# Altium PCB PCB-CAPE-Nucleo_Interface_V1R0.PcbDoc (part 1 of 2)
Units mm, origin at the board's own origin, x right, y up, seen from the top; angles counter-clockwise.
Board outline 100 x 100 mm, 4 copper layers (Top Layer, Layer 1, Layer 2, Bottom Layer), stack 1.494 mm thick; 130 components, 101 nets, 458 pads, 87 vias.
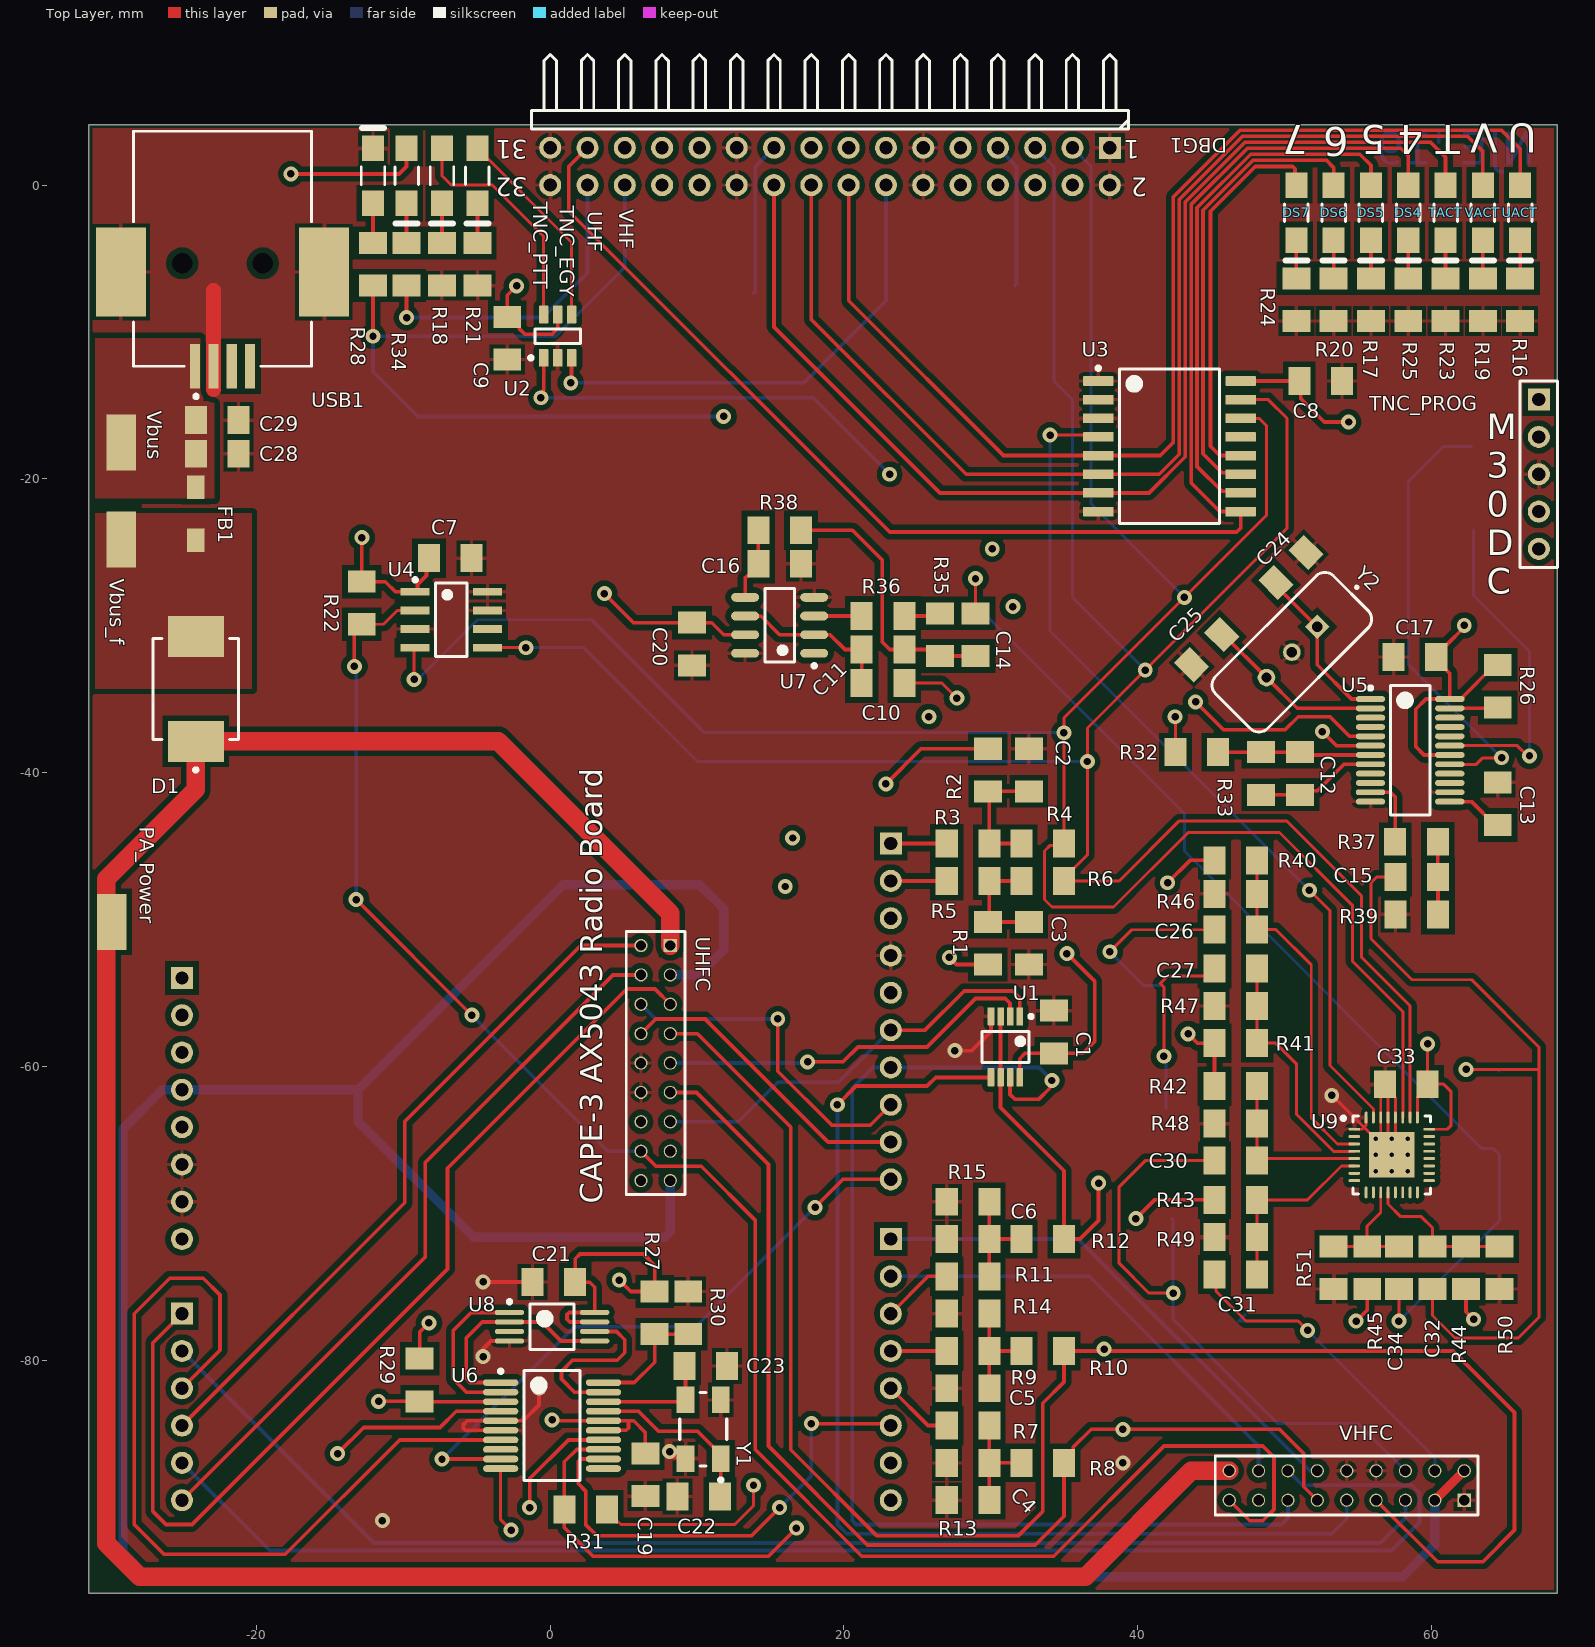
[diagram p0: Top Layer view]
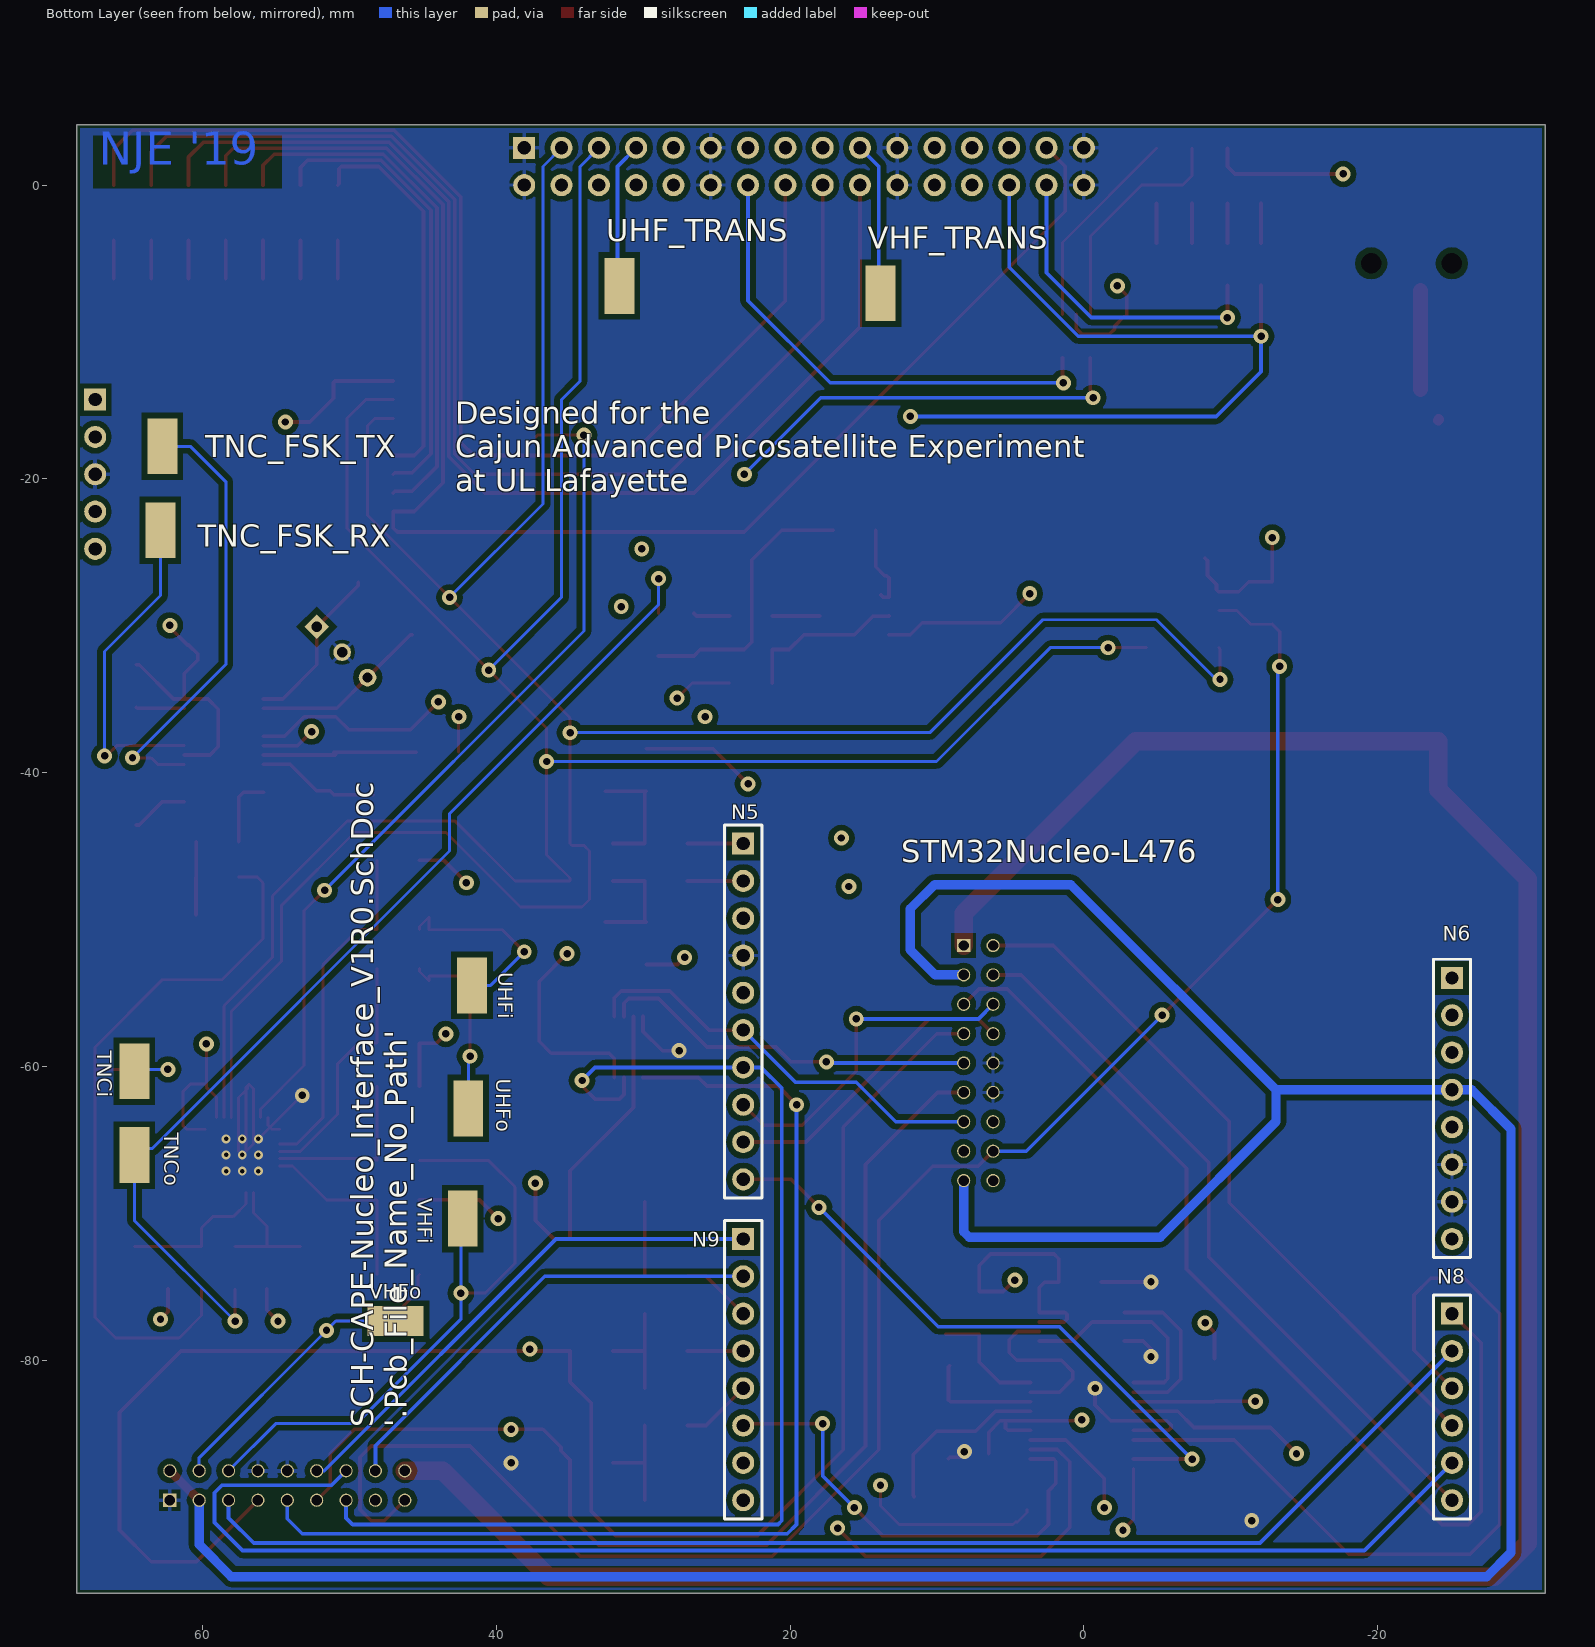
[diagram p1: Bottom Layer view, seen from below]
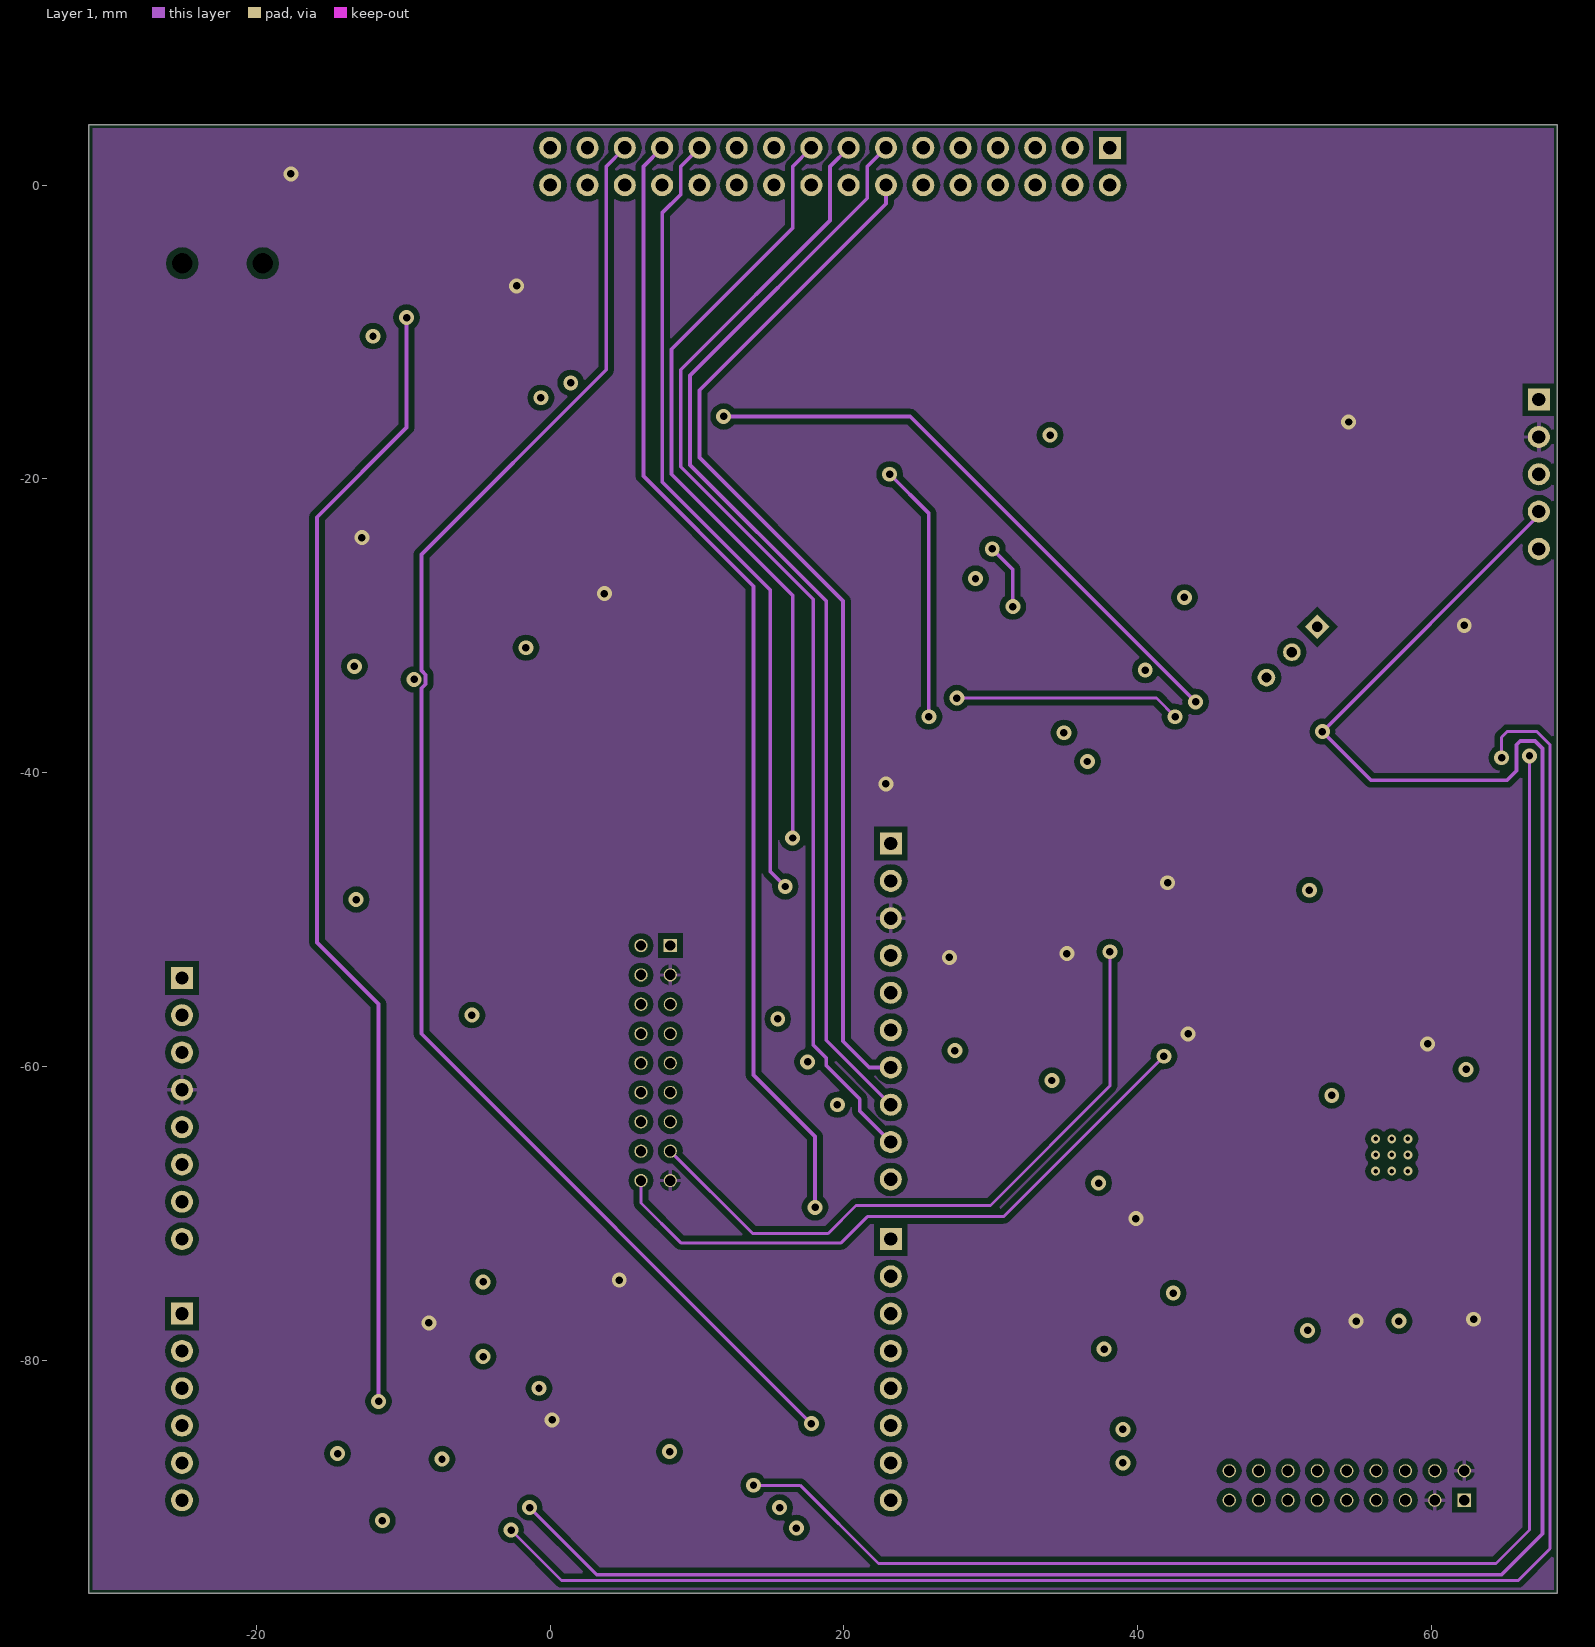
[diagram p2: Layer 1]
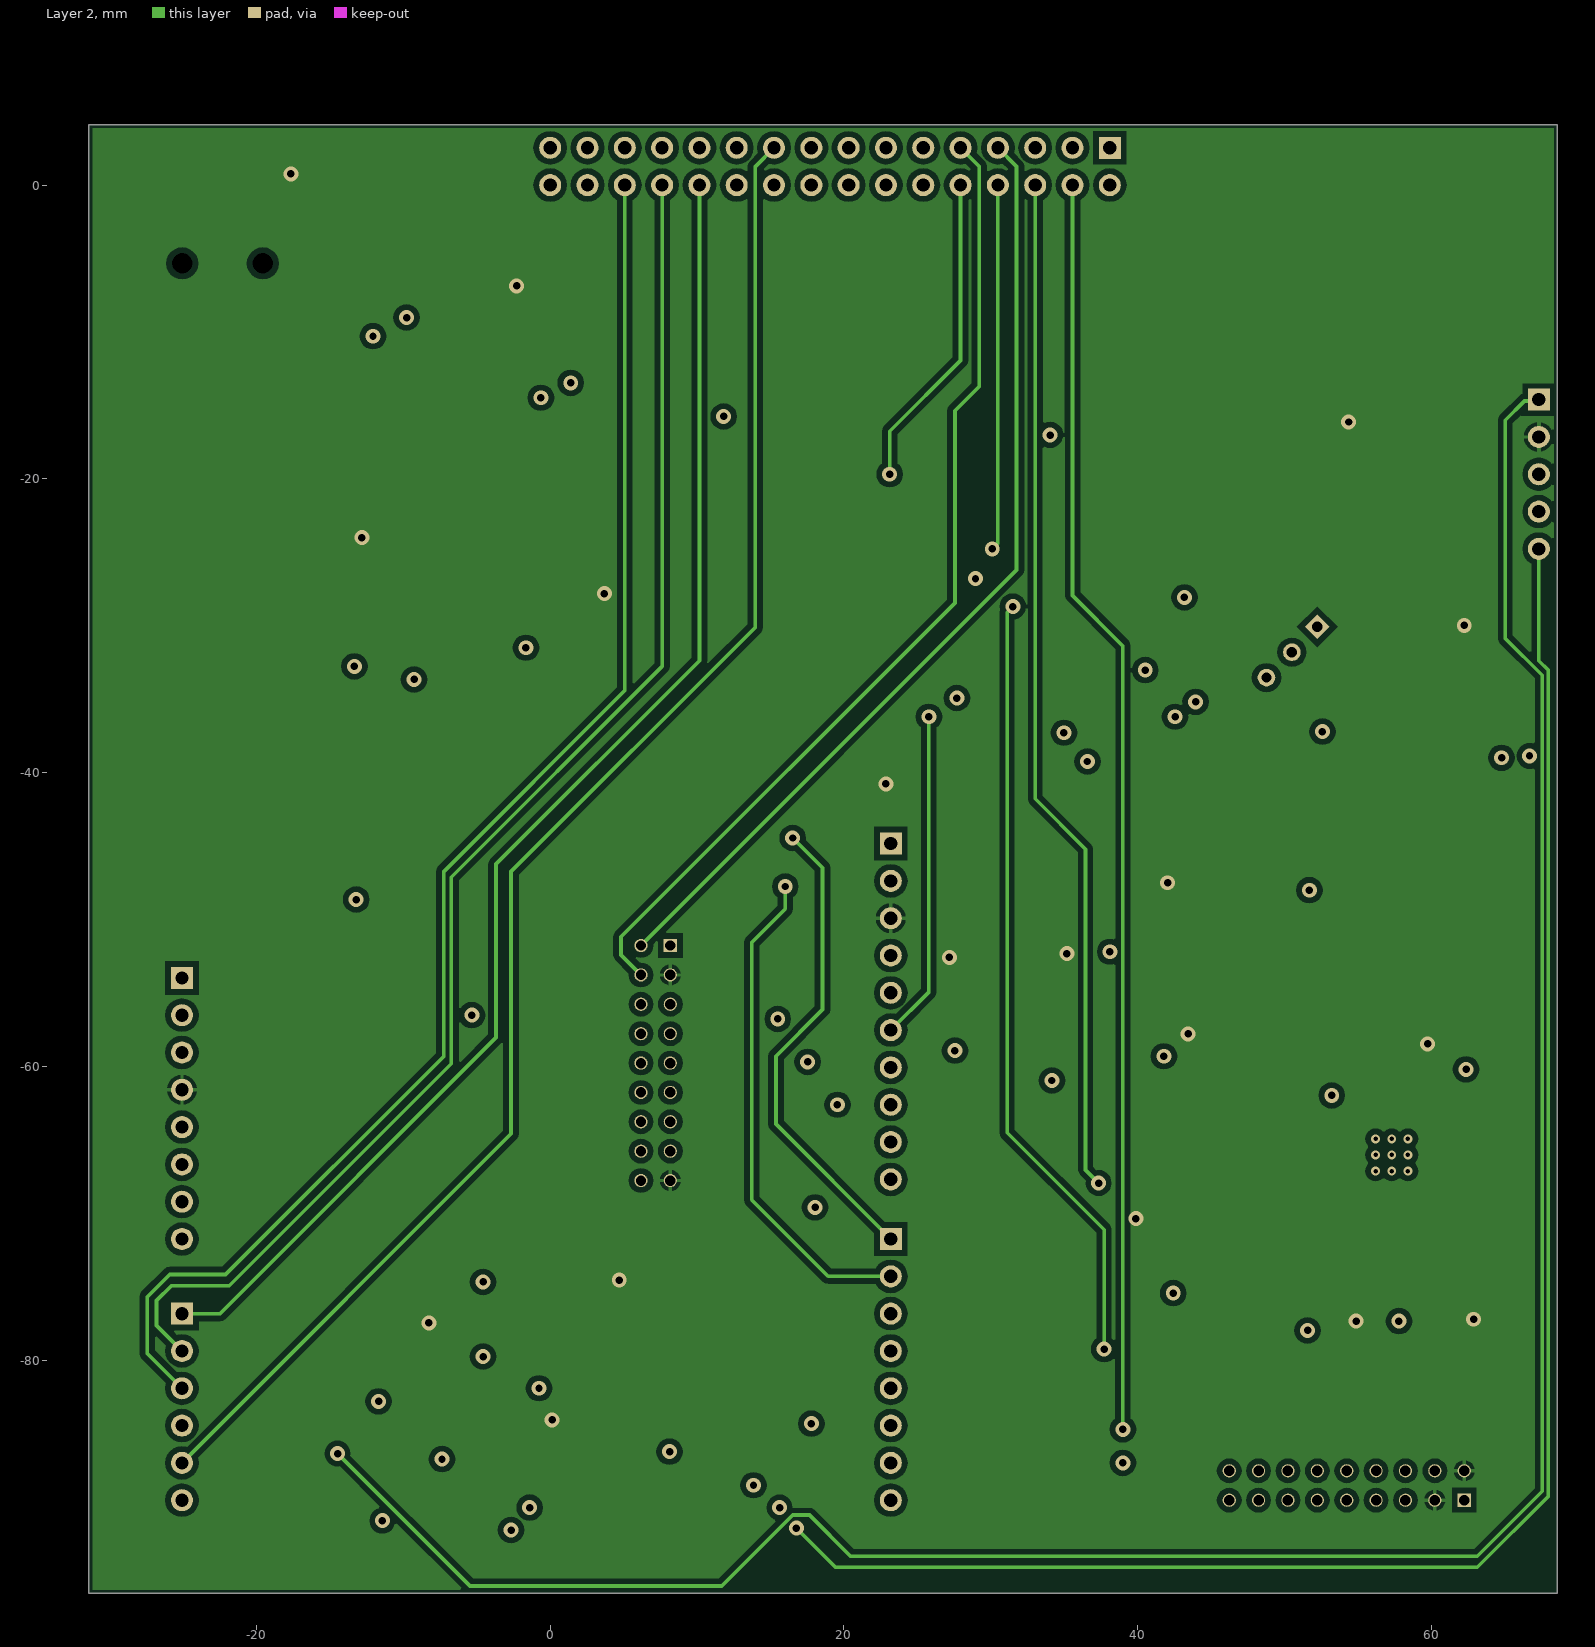
[diagram p3: Layer 2]

## Layer stack, top to bottom
Top Solder: solder mask 0.0102, Solder Resist, Dk 3.5
Top Layer: signal copper 0.035
Dielectric 2: prepreg 0.1118, PP-015, Dk 4.3
Layer 1: signal copper 0.035
Dielectric 1: dielectric 1.13, FR-4, Dk 3.96
Layer 2: signal copper 0.035
Dielectric 3: prepreg 0.1118, PP-015, Dk 4.3
Bottom Layer: signal copper 0.035
Bottom Solder: solder mask 0.0102, Solder Resist, Dk 3.5

## Board outline
-31.42,-95.885 68.58,-95.885 68.58,4.115 -31.42,4.115

## Design rules (kind name [scope] priority, off if disabled: settings)
BoardOutlineClearance [(OnLayer('Top Layer') OR OnLayer('Bottom Layer') OR OnLayer('Layer 1') OR OnLayer('Layer 2'))] p1: gap=0.254 ignorepadtopadclearanceinfootprint=FALSE except(0: Arc-SplitContinuation Track-SplitContinuation SMDPad-SplitContinuation THPad-SplitContinuation Via-SplitContinuation Fill-SplitContinuation Poly-SplitContinuation Region-SplitContinuation Text-SplitContinuation)
Clearance [All] p1: gap=0.152 ignorepadtopadclearanceinfootprint=FALSE except(0.381: Arc-Poly Track-Poly SMDPad-Poly THPad-Poly Via-Poly Fill-Poly Poly-Poly Poly-Region Poly-Text Poly-Hole)
HoleSize [All] p1: absolutevalues=TRUE maxlimit=25.4 minlimit=0.305 maxpercent=80.000 minpercent=20.000
MinimumSolderMaskSliver [All] p1: minsoldermaskwidth=0
PolygonConnect PowerConnect [(InNet('3V3') OR InNet('GND'))] p1: thpad.connectstyle=Relief thpad.reliefconductorwidth=0.254 thpad.reliefentries=4 thpad.polygonreliefangle="90 Angle" thpad.airgapwidth=0.254 smdpad.connectstyle=Relief smdpad.reliefconductorwidth=0.254 smdpad.reliefentries=4 smdpad.polygonreliefangle="90 Angle" smdpad.airgapwidth=0.254 via.connectstyle=Direct via.reliefconductorwidth=0.254 via.reliefentries=4 via.polygonreliefangle="90 Angle" via.airgapwidth=0.254
PolygonConnect [All] p2: connectstyle=Direct reliefconductorwidth=0.254 reliefentries=4 polygonreliefangle="90 Angle" airgapwidth=0.254
RoutingVias [All] p1: holewidth=0.508 width=1.016 viastyle="Through Hole" minholewidth=0.305 minwidth=0.61 maxholewidth=5.08 maxwidth=12.7
SilkToSilkClearance [All] p1: silktosilkclearance=0
SilkToSolderMaskClearance [IsPad] p1: minsilkscreentomaskgap=0 clearancetoexposedcopper=TRUE
SolderMaskExpansion [All] p1: expansion=0.102
Width [All] p1: maxlimit=25.4 minlimit=0.152 preferedwidth=0.254
26 further rules are at their usual default settings.

## Components (designator, comment, footprint, x,y, rotation, side; value= is the part's Value field where it differs from the comment)
C1 "SMT Capacitor" 1206_GENERIC 34.29,-57.658 r90 top value="0.1 µF"
C2 "SMT Capacitor" 1206_GENERIC 32.588,-39.825 r270 top value="150 pF"
C3 "SMT Capacitor" 1206_GENERIC 32.588,-51.615 r90 top value="150 pF"
C4 "SMT Capacitor" 1206_GENERIC 28.45,-86.995 r0 top value="150 pF"
C5 "SMT Capacitor" 1206_GENERIC 28.45,-81.915 r0 top value="150 pF"
C6 "SMT Capacitor" 1206_GENERIC 28.45,-71.755 r0 top value="150 pF"
C7 "SMT Capacitor" 1206_GENERIC -6.805,-25.4 r0 top value="0.1 µF"
C8 "SMT Capacitor" 1206_GENERIC 52.451,-13.335 r0 top value="0.1 µF"
C9 "SMT Capacitor" 1206_GENERIC -2.921,-10.414 r270 top value="0.1 µF"
C10 "SMT Capacitor" 1206_GENERIC 22.659,-33.909 r180 top value="0.1 µF"
C11 "SMT Capacitor" 1206_GENERIC 22.659,-31.623 r0 top value="0.01 µF"
C12 "SMT Capacitor" 1206_GENERIC 51.054,-40.058 r270 top value="100 pF"
C13 "SMT Capacitor" 1206_GENERIC 64.516,-42.111 r90 top value="0.1 µF"
C14 "SMT Capacitor" 1206_GENERIC 28.956,-30.607 r90 top value="0.1 µF"
C15 "SMT Capacitor" 1206_GENERIC 59.002,-47.117 r180 top value="0.1 µF"
C16 "SMT Capacitor" 1206_GENERIC 15.621,-25.781 r180 top value="0.1 µF"
C17 "SMT Capacitor" 1206_GENERIC 58.875,-32.131 r180 top value="0.1 µF"
C19 "SMT Capacitor" 1206_GENERIC 6.477,-87.81 r90 top value="0.1 µF"
C20 "SMT Capacitor" 1206_GENERIC 9.652,-31.242 r90 top value="0.1 µF"
C21 "SMT Capacitor" 1206_GENERIC 0.254,-74.676 r0 top value="0.1 µF"
C22 "SMT Capacitor" 1206_GENERIC 10.107,-89.281 r0 top value="33 pF"
C23 "SMT Capacitor" 1206_GENERIC 10.594,-80.391 r180 top value="33 pF"
C24 "SMT Capacitor" 1206_GENERIC 50.428,-26.026 r225 top value="33 pF"
C25 "SMT Capacitor" 1206_GENERIC 44.695,-31.632 r45 top value="33 pF"
C26 "SMT Capacitor" 1206_GENERIC 46.683,-50.673 r180 top value="1 µF"
C27 "SMT Capacitor" 1206_GENERIC 46.683,-53.34 r180 top value="1 µF"
C28 "SMT Capacitor" 1206_GENERIC -22.68,-18.288 r180 top value="4.7 µF"
C29 "SMT Capacitor" 1206_GENERIC -22.68,-16.002 r180 top value="0.01 µF"
C30 "SMT Capacitor" 1206_GENERIC 46.683,-66.421 r180 top value="1 µF"
C31 "SMT Capacitor" 1206_GENERIC 46.683,-74.168 r180 top value="1 µF"
C32 "SMT Capacitor" 1206_GENERIC 60.071,-73.713 r270 top value="1 µF"
C33 "SMT Capacitor" 1206_GENERIC 58.293,-61.214 r180 top value="0.1 µF"
C34 "SMT Capacitor" 1206_GENERIC 57.785,-73.713 r270 top value="1 µF"
D1 "MBRS340T3" ONSC-SMC-2-403-03_V -24.13,-34.303 r90 top
DBG1 "Digital Discovery" HDR2X16H 38.1,2.54 r180 top
DS4 "APTD3216CGCK" KING-APTD3216CGCK_V 58.42,-1.875 r270 top
DS5 "APTD3216CGCK" KING-APTD3216CGCK_V 55.88,-1.875 r270 top
DS6 "APTD3216CGCK" KING-APTD3216CGCK_V 53.34,-1.875 r270 top
DS7 "APTD3216CGCK" KING-APTD3216CGCK_V 50.8,-1.875 r270 top
FB1 "BLM31PG121SN1L" MURA-BLM31-B35-CHIP-2_V2 -24.13,-22.374 r270 top
N5 "Header 10" HDR1X10 23.19,-44.831 r270 bottom locked
N6 "Header 8" HDR1X8 -25.07,-53.975 r270 bottom locked
N8 "Header 6" HDR1X6 -25.07,-76.835 r270 bottom locked
N9 "Header 8" HDR1X8 23.19,-71.755 r270 bottom locked
PA_Power "5019" KSTN-5019_V -29.845,-50.165 r90 top
R1 "SMT Resistor" 1206_GENERIC 29.794,-51.615 r270 top value="2.2 KO"
R2 "SMT Resistor" 1206_GENERIC 29.794,-39.825 r90 top value="2.2 KO"
R3 "SMT Resistor" 1206_GENERIC 28.45,-44.831 r0 top value=56
R4 "SMT Resistor" 1206_GENERIC 33.53,-44.831 r0 top value=160
R5 "SMT Resistor" 1206_GENERIC 28.45,-47.371 r0 top value=56
R6 "SMT Resistor" 1206_GENERIC 33.53,-47.371 r0 top value=160
R7 "SMT Resistor" 1206_GENERIC 28.45,-84.455 r0 top value=56
R8 "SMT Resistor" 1206_GENERIC 33.53,-86.995 r0 top value=160
R9 "SMT Resistor" 1206_GENERIC 28.45,-79.375 r0 top value=56
R10 "SMT Resistor" 1206_GENERIC 33.53,-79.375 r0 top value=160
R11 "SMT Resistor" 1206_GENERIC 28.45,-74.295 r0 top value=56
R12 "SMT Resistor" 1206_GENERIC 33.53,-71.755 r0 top value=160
R13 "SMT Resistor" 1206_GENERIC 28.45,-89.535 r0 top value="2.2 KO"
R14 "SMT Resistor" 1206_GENERIC 28.45,-76.835 r0 top value="2.2 KO"
R15 "SMT Resistor" 1206_GENERIC 28.45,-69.215 r0 top value="2.2 KO"
R16 "SMT Resistor" 1206_GENERIC 66.04,-7.8 r270 top value=330
R17 "SMT Resistor" 1206_GENERIC 55.88,-7.8 r270 top value=330
R18 "SMT Resistor" 1206_GENERIC -7.366,-5.387 r270 top value=330
R19 "SMT Resistor" 1206_GENERIC 63.5,-7.8 r270 top value=330
R20 "SMT Resistor" 1206_GENERIC 53.34,-7.8 r270 top value=330
R21 "SMT Resistor" 1206_GENERIC -4.953,-5.387 r270 top value=330
R22 "SMT Resistor" 1206_GENERIC -12.827,-28.448 r270 top value="4.7 K"
R23 "SMT Resistor" 1206_GENERIC 60.96,-7.8 r270 top value=330
R24 "SMT Resistor" 1206_GENERIC 50.8,-7.8 r270 top value=330
R25 "SMT Resistor" 1206_GENERIC 58.42,-7.8 r270 top value=330
R26 "SMT Resistor" 1206_GENERIC 64.516,-34.11 r90 top value="100 KO"
R27 "SMT Resistor" 1206_GENERIC 7.112,-76.782 r270 top value="10 KO"
R28 "SMT Resistor" 1206_GENERIC -12.065,-5.387 r90 top value="1 KO"
R29 "SMT Resistor" 1206_GENERIC -8.89,-81.354 r270 top value="10 KO"
R30 "SMT Resistor" 1206_GENERIC 9.398,-76.782 r90 top value="10 KO"
R31 "SMT Resistor" 1206_GENERIC 2.413,-90.17 r0 top value="10 KO"
R32 "SMT Resistor" 1206_GENERIC 44.016,-38.608 r180 top value="100 KO"
R33 "SMT Resistor" 1206_GENERIC 48.387,-40.058 r270 top value="100 KO"
R34 "SMT Resistor" 1206_GENERIC -9.779,-5.387 r270 top value="1 KO"
R35 "SMT Resistor" 1206_GENERIC 26.543,-30.607 r90 top value="10 KO"
R36 "SMT Resistor" 1206_GENERIC 22.659,-29.337 r0 top value="100 KO"
R37 "SMT Resistor" 1206_GENERIC 58.981,-44.704 r180 top value="10 KO"
R38 "SMT Resistor" 1206_GENERIC 15.621,-23.495 r0 top value="100 KO"
R39 "SMT Resistor" 1206_GENERIC 59.002,-49.657 r0 top value="10 KO"
R40 "SMT Resistor" 1206_GENERIC 46.683,-45.974 r180 top value="100 KO"
R41 "SMT Resistor" 1206_GENERIC 46.683,-58.42 r180 top value="100 KO"
R42 "SMT Resistor" 1206_GENERIC 46.683,-61.341 r180 top value="100 KO"
R43 "SMT Resistor" 1206_GENERIC 46.683,-69.088 r180 top value="100 KO"
R44 "SMT Resistor" 1206_GENERIC 62.357,-73.713 r270 top value="100 KO"
R45 "SMT Resistor" 1206_GENERIC 55.626,-73.713 r270 top value="100 KO"
R46 "SMT Resistor" 1206_GENERIC 46.683,-48.26 r0 top value="100 KO"
R47 "SMT Resistor" 1206_GENERIC 46.683,-55.88 r0 top value="100 KO"
R48 "SMT Resistor" 1206_GENERIC 46.683,-63.881 r0 top value="100 KO"
R49 "SMT Resistor" 1206_GENERIC 46.683,-71.628 r0 top value="100 KO"
R50 "SMT Resistor" 1206_GENERIC 64.643,-73.713 r90 top value="100 KO"
R51 "SMT Resistor" 1206_GENERIC 53.34,-73.713 r90 top value="100 KO"
TACT "APTD3216CGCK" KING-APTD3216CGCK_V 60.96,-1.875 r270 top
TNC_EGY "APTD3216CGCK" KING-APTD3216CGCK_V -9.779,0.635 r270 top
TNC_FSK_RX "5019" KSTN-5019_V 62.865,-23.495 r90 bottom
TNC_FSK_TX "5019" KSTN-5019_V 62.738,-17.78 r90 bottom
TNC_PROG "Header 5" HDR1X5 67.31,-14.605 r270 top
TNC_PTT "APTD3216CGCK" KING-APTD3216CGCK_V -12.065,0.635 r90 top
TNCi "5019" KSTN-5019_V 64.643,-60.325 r90 bottom
TNCo "5019" KSTN-5019_V 64.643,-66.04 r270 bottom
U1 "SN74LVC2G125DCTR" DCT0008A_M 30.988,-58.674 r270 top
U2 "SN74LVC2G04DBVT" DBV0006A_M 0.508,-10.287 r90 top
U3 "PCA9554DWR" DW0016A_M 42.164,-17.78 r0 top
U4 "DS2482S-100+" MAXM-SO-8_V -6.731,-29.591 r0 top
U5 "MX614TN" 24SSOP150_M 58.547,-38.481 r0 top
U6 "PIC16LF1847-I/SS" MCHP-SSOP-SS20_M 0.127,-84.455 r0 top
U7 "MCP6023-I/SN" SOIC-SN8_L 15.621,-29.972 r180 top
U8 "23K640-I/ST" TSSOP-ST8_M 0.127,-77.724 r0 top
U9 "ADG2188BCPZ-REEL7" ADI-CP-32-2_M 57.297,-66.03 r0 top
UACT "APTD3216CGCK" KING-APTD3216CGCK_V 66.04,-1.875 r270 top
UHF "APTD3216CGCK" KING-APTD3216CGCK_V -7.366,0.635 r270 top
UHF_TRANS "5019" KSTN-5019_V 31.623,-6.858 r90 bottom
UHFC "COM_UHF_HEADER" "Molex 87758-1816" 8.18,-67.772 r270 top locked
UHFi "5019" KSTN-5019_V 41.656,-54.483 r90 bottom
UHFo "5019" KSTN-5019_V 41.91,-62.865 r90 bottom
USB1 "1734346-1" TECO-1734346-1_V -22.308,-12.334 r90 top
VACT "APTD3216CGCK" KING-APTD3216CGCK_V 63.5,-1.875 r270 top
Vbus "5019" KSTN-5019_V -29.21,-17.526 r90 top
Vbus_f "5019" KSTN-5019_V -29.21,-24.13 r90 top
VHF "APTD3216CGCK" KING-APTD3216CGCK_V -4.953,0.635 r270 top
VHF_TRANS "5019" KSTN-5019_V 13.843,-7.366 r90 bottom
VHFC "COM_VHF_HEADER" "Molex 87758-1816" 46.23,-89.535 r180 top locked
VHFi "5019" KSTN-5019_V 42.291,-70.358 r90 bottom
VHFo "5019" KSTN-5019_V 46.863,-77.343 r0 bottom
Y1 "ABM3B-20.000MHZ-B2-T" ABRA-ABM3B_V 10.414,-84.709 r90 top
Y2 "ECS-035-18-4X-DU" ECS-4X-3IL 50.493,-31.803 r225 top

## Footprints (in the part's own frame and the unit in brackets; to place one, negate y for a bottom-side part, rotate by r counter-clockwise, add the part's x,y. Pads: shape width x height; smd on the part's side, far side on the other; paste and mask are expansions set on the pad)
24SSOP150_M [mm] "SOP, 24-Leads, Body 8.7x3.9mm, Pitch 0.635mm, IPC Low Density"
  oval 2x0.4 smd: 1(-2.7,3.492) 2(-2.7,2.857) 3(-2.7,2.222) 4(-2.7,1.587) 5(-2.7,0.953) 6(-2.7,0.318) 7(-2.7,-0.318) 8(-2.7,-0.953) 9(-2.7,-1.587) 10(-2.7,-2.222) 11(-2.7,-2.857) 12(-2.7,-3.492) 13(2.7,-3.492) 14(2.7,-2.857) 15(2.7,-2.222) 16(2.7,-1.587) 17(2.7,-0.953) 18(2.7,-0.318) 19(2.7,0.318) 20(2.7,0.953) 21(2.7,1.587) 22(2.7,2.222) 23(2.7,2.857) 24(2.7,3.492)
  silkscreen extent -2.82,-4.4 1.35,4.4, body extent -1.99,-4.4 1.99,4.4, height 1.73
1206_GENERIC [mm] "Generic 1206 Resistor/non-polarized capacitor"
  rect 1.5x1.9 smd: 1(-1.45,0) 2(1.45,0)
  body extent -1.6,-0.85 1.6,0.85, height 0.65
ABRA-ABM3B_V [mm] "SMD, 4-Leads, Body 5x3.2mm"
  rect 1.8x1.2 smd: 1(-2,-1.2) 2(2,-1.2) 3(2,1.2) 4(-2,1.2)
  silkscreen extent -3.57,-1.6 2.5,1.6, body extent -2.5,-1.59 2.5,1.59, height 1.13
ADI-CP-32-2_M [mm] "QFN, 32-Leads, Body 5x5mm, Pitch 0.5mm, Thermal Pad 3.1x3.1mm, IPC Low Density"
  oval 0.8x0.2 smd: 1(-2.55,1.75) 2(-2.55,1.25) 3(-2.55,0.75) 4(-2.55,0.25) 5(-2.55,-0.25) 6(-2.55,-0.75) 7(-2.55,-1.25) 8(-2.55,-1.75) 17(2.55,-1.75) 18(2.55,-1.25) 19(2.55,-0.75) 20(2.55,-0.25) 21(2.55,0.25) 22(2.55,0.75) 23(2.55,1.25) 24(2.55,1.75)
  oval 0.2x0.8 smd: 9(-1.75,-2.55) 10(-1.25,-2.55) 11(-0.75,-2.55) 12(-0.25,-2.55) 13(0.25,-2.55) 14(0.75,-2.55) 15(1.25,-2.55) 16(1.75,-2.55) 25(1.75,2.55) 26(1.25,2.55) 27(0.75,2.55) 28(0.25,2.55) 29(-0.25,2.55) 30(-0.75,2.55) 31(-1.25,2.55) 32(-1.75,2.55)
  rect 3.1x3.1 smd: 33(0,0)
  silkscreen extent -3.42,-2.65 2.65,2.65, body extent -2.5,-2.5 2.5,2.5, height 1
DBV0006A_M [mm] "SOT23, 6-Leads, Body 3.05x1.75mm, Pitch 0.95mm, IPC Low Density"
  rrect15% 1.2x0.65 smd: 1(-1.475,0.95) 2(-1.475,0) 3(-1.475,-0.95) 4(1.475,-0.95) 5(1.475,0) 6(1.475,0.95)
  silkscreen extent -1.6,-1.55 0.5,1.95, body extent -1.42,-1.46 1.42,1.46, height 1.11
DCT0008A_M [mm] "SOP, 8-Leads, Body 2.9x3.2mm, Pitch 0.65mm, IPC Low Density"
  rrect22% 1.25x0.45 smd: 1(-2.075,0.975) 2(-2.075,0.325) 3(-2.075,-0.325) 4(-2.075,-0.975) 5(2.075,-0.975) 6(2.075,-0.325) 7(2.075,0.325) 8(2.075,0.975)
  silkscreen extent -2.2,-1.6 1.05,1.88, body extent -2.01,-1.47 2.01,1.48, height 1.3
DW0016A_M [mm] "SOIC, 16-Leads, Body 10.5x7.6mm, Pitch 1.27mm, IPC Low Density"
  rrect15% 2.1x0.65 smd: 1(-4.85,4.445) 2(-4.85,3.175) 3(-4.85,1.905) 4(-4.85,0.635) 5(-4.85,-0.635) 6(-4.85,-1.905) 7(-4.85,-3.175) 8(-4.85,-4.445) 9(4.85,-4.445) 10(4.85,-3.175) 11(4.85,-1.905) 12(4.85,-0.635) 13(4.85,0.635) 14(4.85,1.905) 15(4.85,3.175) 16(4.85,4.445)
  silkscreen extent -4.97,-5.25 3.4,5.44, body extent -5.14,-5.13 5.14,5.13, height 2.5
ECS-4X-3IL [mm]
  rect 1.2x1.2 hole 0.7: 1(-2.44,0)
  round 1.2 hole 0.7: 2(0,0) 3(2.44,0)
  silkscreen extent -6.34,-2.5 5.68,2.5, body extent -5.68,-2.5 5.68,2.5, height 3.5
HDR1X5 [mm] "Connector; Header; 5 Position"
  rect 1.5x1.5 hole 0.9: 1(0,0)
  round 1.5 hole 0.9: 2(2.54,0) 3(5.08,0) 4(7.62,0) 5(10.16,0)
  silkscreen extent -1.27,-1.27 11.43,1.27
HDR1X6 [mm] "Connector; Header; 6 Position"
  rect 1.5x1.5 hole 0.9: 1(0,0)
  round 1.5 hole 0.9: 2(2.54,0) 3(5.08,0) 4(7.62,0) 5(10.16,0) 6(12.7,0)
  silkscreen extent -1.27,-1.27 13.97,1.27
HDR1X8 [mm] "Connector; Header; 8 Position"
  rect 1.5x1.5 hole 0.9: 1(0,0)
  round 1.5 hole 0.9: 2(2.54,0) 3(5.08,0) 4(7.62,0) 5(10.16,0) 6(12.7,0) 7(15.24,0) 8(17.78,0)
  silkscreen extent -1.27,-1.27 19.05,1.27
HDR1X10 [mm] "Connector; Header; 10 Position"
  rect 1.5x1.5 hole 0.9: 1(0,0)
  round 1.5 hole 0.9: 2(2.54,0) 3(5.08,0) 4(7.62,0) 5(10.16,0) 6(12.7,0) 7(15.24,0) 8(17.78,0) 9(20.32,0) 10(22.86,0)
  silkscreen extent -1.27,-1.27 24.13,1.27
HDR2X16H [mm] "Connector; Header; 16x2 Position; Right Angle"
  rect 1.5x1.5 hole 0.9: 1(0,0)
  round 1.5 hole 0.9: 2(0,2.54) 3(2.54,0) 4(2.54,2.54) 5(5.08,0) 6(5.08,2.54) 7(7.62,0) 8(7.62,2.54) 9(10.16,0) 10(10.16,2.54) 11(12.7,0) 12(12.7,2.54) 13(15.24,0) 14(15.24,2.54) 15(17.78,0) 16(17.78,2.54) 17(20.32,0) 18(20.32,2.54) 19(22.86,0) 20(22.86,2.54) 21(25.4,0) 22(25.4,2.54) 23(27.94,0) 24(27.94,2.54) 25(30.48,0) 26(30.48,2.54) 27(33.02,0) 28(33.02,2.54) 29(35.56,0) 30(35.56,2.54) 31(38.1,0) 32(38.1,2.54)
  silkscreen extent -1.27,-6.35 39.37,-1.27
KING-APTD3216CGCK_V [mm] "SMD, 2-Leads, Body 3.2x1.6mm"
  rect 1.75x1.5 smd: 1(-1.875,0) 2(1.875,0)
  silkscreen extent -0.6,-0.8 3.25,0.8, body extent -1.6,-0.8 1.6,0.8, height 1.8
KSTN-5019_V [mm] "Test Point, 1-Leads, Body 3.81x2.03mm"
  rect 3.8x2.03 smd: 1(0,0)
  body extent -1.9,-1.01 1.9,1.02, height 2.29
MAXM-SO-8_V [mm] "SOIC, 8-Leads, Body 5x4mm, Pitch 1.27mm"
  rect 1.98x0.53 smd: 1(-2.465,1.905) 2(-2.465,0.635) 3(-2.465,-0.635) 4(-2.465,-1.905) 5(2.465,-1.905) 6(2.465,-0.635) 7(2.465,0.635) 8(2.465,1.905)
  silkscreen extent -2.59,-2.5 1.08,2.84, body extent -3.01,-2.5 3.01,2.5, height 1.75
MCHP-SSOP-SS20_M [mm] "SOP, 20-Leads, Body 7.2x5.3mm, Pitch 0.65mm, IPC Low Density"
  oval 2.4x0.45 smd: 1(-3.5,2.925) 2(-3.5,2.275) 3(-3.5,1.625) 4(-3.5,0.975) 5(-3.5,0.325) 6(-3.5,-0.325) 7(-3.5,-0.975) 8(-3.5,-1.625) 9(-3.5,-2.275) 10(-3.5,-2.925) 11(3.5,-2.925) 12(3.5,-2.275) 13(3.5,-1.625) 14(3.5,-0.975) 15(3.5,-0.325) 16(3.5,0.325) 17(3.5,0.975) 18(3.5,1.625) 19(3.5,2.275) 20(3.5,2.925)
  silkscreen extent -3.62,-3.75 1.9,3.82, body extent -2.8,-3.75 2.8,3.75, height 2
"Molex 87758-1816" [mm] "Header, 2.00 mm pitch, 18-position, dual-row, through-hole, vertical"
  rect 0.9x0.9 hole 0.71: 1(-16,0)
  round 0.9 hole 0.71: 2(-16,-2) 3(-14,0) 4(-14,-2) 5(-12,0) 6(-12,-2) 7(-10,0) 8(-10,-2) 9(-8,0) 10(-8,-2) 11(-6,0) 12(-6,-2) 13(-4,0) 14(-4,-2) 15(-2,0) 16(-2,-2) 17(0,0) 18(0,-2)
  silkscreen extent -16.95,-3 0.95,1, body extent -16.95,-3 0.95,1, height 5.75
MURA-BLM31-B35-CHIP-2_V2 [mm] "Chip Ferrite Bead, 2-Leads, Body 3.2x1.6mm, Height 1.3mm, 35/70um Land Pad Thickness, 3.5A Rated Current"
  rect 1.6x1.2 smd: 1(-1.8,0) 2(1.8,0)
  body extent -1.6,-0.8 1.6,0.8, height 1.3
ONSC-SMC-2-403-03_V [mil] "Molded, 2-Leads, Body 6.86x5.84mm"
  rect 110x150 smd: 1(-140.49,0) 2(140.49,0)
  silkscreen extent -222,-115 135,115, body extent -135,-115 135,115, height 99
SOIC-SN8_L [mm] "SOIC, 8-Leads, Body 4.9x3.9mm, Pitch 1.27mm, IPC High Density"
  oval 1.9x0.6 smd: 1(-2.35,1.905) 2(-2.35,0.635) 3(-2.35,-0.635) 4(-2.35,-1.905) 5(2.35,-1.905) 6(2.35,-0.635) 7(2.35,0.635) 8(2.35,1.905)
  silkscreen extent -2.48,-2.5 1,2.88, body extent -2,-2.5 2,2.5, height 1.75
TECO-1734346-1_V [mm] "SMD, 4-Leads, Body 12.04x16mm, Height 10.87 mm"
  rect 3x0.7 smd: 1(0,1.87) 2(0,-0.62) 3(0,-1.87) 4(0,0.62)
  rect 6.04x3.4 smd: 5(6.42,6.92) 6(6.42,-6.92)
  round 0.6 hole 1.4 unplated: MH(7,-2.75) MH(7,2.75)
  silkscreen extent -2.17,-6.07 16,6.07, body extent -1.1,-8.25 16,8.25, height 11.3
TSSOP-ST8_M [mm] "TSOP, 8-Leads, Body 3x4.4mm, Pitch 0.65mm, IPC Low Density"
  oval 2x0.35 smd: 1(-2.9,0.975) 2(-2.9,0.325) 3(-2.9,-0.325) 4(-2.9,-0.975) 5(2.9,-0.975) 6(2.9,-0.325) 7(2.9,0.325) 8(2.9,0.975)
  silkscreen extent -3.02,-1.55 1.5,1.82, body extent -2.25,-1.55 2.25,1.55, height 1.2

## Part data
C1 C2 C3 C4 C5 C6 C7 C8 C9 C10 C11 C12 C13 C14 C15 C16 C17 C19 C20 C21 C22 C23 C24 C25 C26 C27 C28 C29 C30 C31 C32 C33 C34: "Ceramic Capacitor, =Value, =Tolerance, =VoltageRating, =Package", Package=1206
D1: library part CMP-1055-00395-1, "Schottky Power Rectifier, 2-Pin SMC, Tape and Reel", Manufacturer="On Semiconductor", ComponentLink1Description="Manufacturer URL", ComponentLink1URL=http://www.onsemi.com/, ComponentLink2Description=Datasheet, ComponentLink2URL=http://www.onsemi.cn/pub_link/Collateral/MBRS340T3-D.PDF, ComponentLink3Description="Package Specification", ComponentLink3URL=http://www.onsemi.com/pub_link/Collateral/403-03.PDF, Configuration=Single, DatasheetVersion="Rev. 11", IFSM Max (A)=80, Mounting Technology="Surface Mount", PackageDescription="2-Pin Small Molded Package, J-Bend Lead, Body 5.845 x 6.855 mm", PackageReference=SMC-2-403-03, PackageVersion="Rev. E, 08/2005", Packing="Tape and Reel", PartNumber=MBRS340T3, RoHS=FALSE
DBG1: library part "Header 16X2H", "Header, 16-Pin, Dual row, Right Angle", LatestRevisionDate=17-Jul-2002, LatestRevisionNote="Re-released for DXP Platform.", Publisher="Altium Limited"
DS4 DS5 DS6 DS7 TACT TNC_EGY TNC_PTT UACT UHF VACT VHF: library part CMP-2000-05792-1, "Chip LED Lamp, Green, 5 V, 30 mA, -40 to 85 degC, 2-Pin SMD, RoHS, Tape and Reel", Color=Green, Current - Test=20mA, Manufacturer=Kingbright, Millicandela Rating=300mcd, Package / Case=1206(3216Metric), Package Description="2-Pin Surface Mount Device, Body 3.2 x 1.6 mm", Standard Package=2,000, Voltage - Forward (Vf) (Typ)=2.1V, 3D Model="APTD3216x.sldprt /  / APTD3216x.pro /  / APTD3216x.igs /  / APTD3216x.stp", Catalog Drawings="APTD3216SeriesTop /  / APTD3216SeriesSide", Category=Optoelectronics, Datasheet URL=https://www.kingbrightusa.com/images/catalog/spec/APTD3216CGCK.pdf, Datasheet Version="Rev. V.17B, 04/2015", Family=LEDIndication-Discrete, Height=1.80mm, Lens Style/Size=RoundwithDomedTop,1.6mm, Lens Type=Clear, Manufacturer URL=http://www.kingbright.com/, Mounting Technology=SurfaceMount, Mounting Type=SurfaceMount, Online Catalog=3.2mmx1.6mmRoundwithDomedTop1206PackageLEDs, Other Names=754-1152-2, Package Reference=APTD3216CGCK, Packaging=Tape&Reel(TR), Part Number=APTD3216CGCK, Size / Dimension=3.20mmLx1.60mmW, Viewing Angle=50°, Wavelength - Dominant=570nm, Wavelength - Peak=574nm
FB1: library part CMP-0686-00732-2, "Chip Ferrite Bead for Power Lines, 120 Ohm, 3500 mA, -55 to 125 degC, 3.2 x 1.6 x 1.3 mm SMD, Tape and Reel", DC Resistance="0.02 Ohm Max.", Manufacturer=Murata, Operating Temperature Range="-55 to 125 degC", Rated Current="3500 mA", ComponentLink1Description="Manufacturer URL", ComponentLink1URL=http://www.murata.com/, ComponentLink2Description=Datasheet, ComponentLink2URL=http://www.murata.com/products/catalog/pdf/c31e.pdf, ComponentLink3Description="Package Specification", ComponentLink3URL=http://www.murata.com/products/catalog/pdf/c31e.pdf, DatasheetVersion=08/2013, Impedance (at 100 MHz)="120 Ohm +/- 25%", Mounting Technology="Surface Mount", PackageDescription="2-Pin Chip, Body 3.2 x 1.6 mm", PackageReference=BLM31-2, Packing="Tape and Reel", Part Number=BLM31PG121SN1L
N5: "Header, 10-Pin", LatestRevisionDate=17-Jul-2002, LatestRevisionNote="Re-released for DXP Platform.", Publisher="Altium Limited"
N6 N9: "Header, 8-Pin", LatestRevisionDate=17-Jul-2002, LatestRevisionNote="Re-released for DXP Platform.", Publisher="Altium Limited"
N8: "Header, 6-Pin", LatestRevisionDate=17-Jul-2002, LatestRevisionNote="Re-released for DXP Platform.", Publisher="Altium Limited"
PA_Power TNC_FSK_RX TNC_FSK_TX TNCi TNCo UHF_TRANS UHFi UHFo Vbus Vbus_f VHF_TRANS VHFi VHFo: library part CMP-1672-00008-1, "Test Point, 1 Position SMD, RoHS, Tape and Reel", Manufacturer="Keystone Electronics", Package Quantity=1000, ComponentLink1Description="Manufacturer URL", ComponentLink1URL=http://www.keyelco.com/, ComponentLink2Description=Datasheet, ComponentLink2URL=http://www.keyelco.com/product-pdf.cfm?p=1357, Contact Plating=9, DatasheetVersion=03/2014, Mount="Surface Mount", Mounting Technology="Surface Mount", PackageDescription="1-Pin Surface Mount Device, Body 3.81 x 2.03 mm", PackageReference=5019, Packaging="Tape and Reel", Part Number=5019, Pins=1, RoHSCompliant=True
R1 R2 R3 R4 R5 R6 R7 R8 R9 R10 R11 R12 R13 R14 R15 R16 R17 R18 R19 R20 R21 R22 R23 R24 R25 R26 R27 R28 R29 R30 R31 R32 R33 R34 R35 R36 R37 R38 R39 R40 R41 R42 R43 R44 R45 R46 R47 R48 R49 R50 R51: "Generic SMT Resistor", Package=1206, Power Rating={PR}, Tolerance={Tol}
TNC_PROG: "Header, 5-Pin", LatestRevisionDate=17-Jul-2002, LatestRevisionNote="Re-released for DXP Platform.", Publisher="Altium Limited"
U1: library part CMP-0859-00540-3, "Dual Bus Buffer Gate with 3-State Outputs, DCT0008A, LARGE T&R", F @ Nom Voltage(Max)(Mhz)=150, Generic Part Number=SN74LVC2G125, ICC @ Nom Voltage(Max)(mA)=0.01, Manufacturer="Texas Instruments", Operating Temperature Range(C)="-40 to 125", Rating=Catalog, tpd @ Nom Voltage(Max)(ns)=9.1,4.8,4.3,3.7, Voltage(Nom)(V)=1.8,2.5,3.3,5, 3-State Output=Yes, Bits(#)=2, DatasheetVersion=SCES204O, Input Type=CMOS/TTL, Logic=True, Output Drive (IOL/IOH)(Max)(mA)=32/-32, Output Type=CMOS, PackageReference=DCT0008A, PartId=1, Schmitt Trigger=No, Sub-Family="Non-Inverting Buffer/Driver", Technology Family=LVC, VCC(Max)(V)=5.5, VCC(Min)(V)=1.65
U2: library part CMP-0859-00210-3, "Dual Inverter, DBV0006A, SMALL T&R", F @ Nom Voltage(Max)(Mhz)=150, Generic Part Number=SN74LVC2G04, ICC @ Nom Voltage(Max)(mA)=0.01, Manufacturer="Texas Instruments", Operating Temperature Range(C)="-40 to 125", Rating=Catalog, tpd @ Nom Voltage(Max)(ns)=8,4.9,4.6,3.7, Voltage(Nom)(V)=1.8,2.5,3.3,5, 3-State Output=No, Bits(#)=2, DatasheetVersion=SCES195M, Input Type=CMOS/TTL, Logic=Inverting, Output Drive (IOL/IOH)(Max)(mA)=32/-32, Output Type=CMOS, PackageReference=DBV0006A, PartId=1, Schmitt Trigger=No, Sub-Family="Inverting Buffer/Driver", Technology Family=LVC, VCC(Max)(V)=5.5, VCC(Min)(V)=1.65
U3: library part CMP-0314-00167-2, "Remote 8-Bit I2C and SMBus I/O Expander with Interrupt Output and Configuration Registers, 8 Outputs, 2.3 to 5.5 V, -40 to 85 degC, 16-pin SOIC (DW), Green (RoHS & no Sb/Br)", 5V Tolerant I/O=Yes, Manufacturer="Texas Instruments", Max Frequency(kHz)=400, # of I/Os=8, Code_JEDEC=MS-013-AA, ComponentLink1Description=Datasheet, ComponentLink1URL=http://www.ti.com/general/docs/lit/getliterature.tsp?genericPartNumber=PCA9554&fileType=pdf, ComponentLink2Description="Package Specification", ComponentLink2URL=http://www.ti.com/litv/pdf/msoi003g, Configuration Registers=Yes, DatasheetVersion=SCPS128B, Eco-Plan="Green (RoHS & no Sb/Br)", fSCLK(Max)(MHz)=400, I2C Address="0100 xxx", Interrupt Output=Yes, Mounting Technology="Surface Mount", No. of Outputs=8, PackageDescription="16-Pin Small Outline Integrated Circuit, 10.3 x 7.5 mm, Pitch 1.27 mm Pitch", PackageReference=DW0016A, PackageVersion="revG, Jan-2011", PartNumber=PCA9554DWR, Push-Pull I/O Type=Yes, SubFamily="I2C IO Expander", Technology Family=PCA, VCC(Max)(V)=5.5, VCC(Min)(V)=2.3, Vcc range(V)="2.3 to 5.5"
U4: library part CMP-2000-06185-1, "Single-Channel 1-Wire Master, 2.9 to 5.5 V, -40 to 85 degC, 8-Pin SO, RoHS, Rail/Tube", Current - Supply=750µA, Manufacturer=Maxim, Operating Temperature=-40°C~85°C, Package / Case="8-SOIC(0.154\",3.90mmWidth)", Package Description="8-Pin Small Outline Integrated Circuit, Body 5 x 4 mm, Pitch 1.27 mm", Package Reference=SO-8, Standard Package=100, Supplier Device Package=8-SOIC, Voltage - Supply=3.3V,5V, Category=IntegratedCircuits(ICs), Datasheet URL=http://www.mouser.com/ds/2/256/DS2482-100-39831.pdf, Datasheet Version="Rev. 10, 01/2015", Dynamic Catalog=I²CControllers, Family=Interface-Controllers, Function=Bridge,1-Wire®toI²C, Interface=I²C, Manufacturer URL=http://www.maximintegrated.com/, Mounting Technology=SurfaceMount, Package URL=http://pdfserv.maximintegrated.com/package_dwgs/21-0041.PDF, Packaging=Tube, Product Training Modules="Lead(SnPb)FinishforCOTS /  / Long-TermSupplyProgram", Protocol=1-Wire®, Series=-, Standards=-
U5: library part MX614, Manufacturer="CML Microcircuits", Part Number=MX614TN
U6: library part CMP-0115-02811-1, "Flash Microcontroller with XLP Technology, 32 MHz, 15 I/O, -40 to 85 degC, 20-pin SSOP (SS20), Tube", Manufacturer=Microchip, Operation Voltage Range="1.8V - 3.6V", # of A/D Channels=12, ComponentLink1Description=Datasheet, ComponentLink1URL=http://ww1.microchip.com/downloads/en/DeviceDoc/40001453D.pdf, ComponentLink2Description="Package Specification", ComponentLink2URL=http://www.microchip.com/stellent/groups/techpub_sg/documents/packagingspec/en012702.pdf, ComponentLink3Description="URL Link1", ComponentLink3URL="Product URL:http://www.microchip.com/datasheet/PIC16F1847", DatasheetVersion="Rev. D", Digital Communication="1 -A/E/USART, 2 -MSSP(SPI/I2C)", EEPROM Data Memory (bytes)=256, I/O Pins=15, Internal Oscillator="32 MHz, 31 kHz", Max. CPU Speed MHz=32, Memory Type=Flash, Mounting Technology="Surface Mount", PackageDescription="20-Lead Plastic Shrink Small Outline, 5.3 x 7.2 mm Body, 0.65 mm Pitch", PackageReference=SSOP-SS20, PackageVersion="C04-072B, 12/2012", Packing=TUBE, PartNumber=PIC16LF1847-I/SS, Program Memory KBytes=14, Program Memory KWords=8, RAM=1024, Timers="4 - 8-bit, 1 - 16-bit"
U7: library part CMP-0187-00277-2, "Rail-to-Rail Input/Output, 10 MHz Operational Amplifier, 8-Pin SOIC, Industrial Temperature", Code_IPC=SOIC127P600-8, Code_JEDEC=MS-012, ComponentLink1Description="Manufacturer URL", ComponentLink1URL=http://www.microchip.com/, ComponentLink2Description=Datasheet, ComponentLink2URL=http://ww1.microchip.com/downloads/en/DeviceDoc/21685d.pdf, ComponentLink3Description="Package Specification", ComponentLink3URL=http://www.microchip.com/stellent/groups/techpub_sg/documents/packagingspec/en012702.pdf, DatasheetVersion="revD, Feb-2009", PackageDescription="8-Lead Plastic Small Outline (SN) - Narrow, 3.90mm Body [SOIC]", PackageReference=SOIC-SN8, PackageVersion="revBB, Aug-2009", RevisionNote="URLs added."
U8: library part CMP-0163-00024-1, "64K, 8192x8-bit, 3.6V SPI Serial SRAM, 8-Pin TSSOP, Industrial Temperature", Code_JEDEC=MO-153, DatasheetVersion="revC, Apr-2009", PackageDescription="8-Lead Plastic Thin Shrink Small Outline (ST) - 4.4mm Body [TSSOP]", PackageReference=TSSOP-ST8, PackageVersion="revBB, Aug-2009"
U9: library part CMP-0788-00011-1, "I2C(R) CMOS 8 x 8 Unbuffered Analog Switch Array with Dual / Single Supplies, +/-5 V Supply, 32-pin QFN (CP-32-2), Reel", Manufacturer="Analog Devices", Supply Voltage (V)=+/-5, Code_JEDEC=MO-220-VHHD-2, ComponentLink1Description="Manufacturer URL", ComponentLink1URL=http://www.analog.com/en/index.html, ComponentLink2Description=Datasheet, ComponentLink2URL=http://www.analog.com/static/imported-files/data_sheets/ADG2188.pdf, ComponentLink3Description="Package Specification", ComponentLink3URL=http://www.analog.com/static/imported-files/packages/414143737956480539664569CP_32_2.pdf, Control Interface=I2C, DatasheetVersion="Rev. 0", Mounting Technology="Surface Mount", Output Buffer=No, PackageDescription="32-Pin Lead Frame Chip Scale Package, Body 5 x 5 mm, Pitch 0.5 mm", PackageReference=CP-32-2, PackageVersion=Jan-05, Packing=Reel, PartNumber=ADG2188BCPZ-REEL7, Small Signal BW (MHz)=300
UHFC VHFC: library part "Header 9X2", "Header, 9-Pin, Dual row", LatestRevisionDate=17-Jul-2002, LatestRevisionNote="Re-released for DXP Platform.", Publisher="Altium Limited"
USB1: library part CMP-2000-07498-1, "USB-B Receptacle Connector, Height 10.87 mm, 0 to 50 degC, RoHS, Tray", Case\/Package=SMD/SMT, Flammability Rating=UL94V-0, Housing Colour=Black, Insulation Resistance=1GR, Manufacturer="TE Connectivity", Package Description="4-Pin Pin Surface Mount Device, Body 12.04 x 16 mm, Height 10.87 mm", Package Quantity=100, Part Number=1-1734346-1, Connector Type=Receptacle, Contact Material=Bronze, Contact Plating=Gold, Datasheet URL=http://www.te.com/commerce/DocumentDelivery/DDEController?Action=srchrtrv&DocNm=1734346&DocType=Customer+Drawing&DocLang=English, Datasheet Version="Rev. C, 06/2011", Depth=16mm, ELV=Compliant, Gender=Receptacle, Housing Material=Nylon, Insulation Material=Thermoplastic, Length=16.5mm, Manufacturer URL=http://www.te.com/, Material=Bronze, Mount=Horizontal, Mounting Technology=SurfaceMount, Number of Contacts=4, Number of Ports=1, Number of Positions=4, Number of Terminals=4, Orientation=RightAngle, Package Reference=1734346-1, Packaging=Tray, Plating=Nickel, REACH SVHC=Unknown, RoHSCompliant=true, Termination=SMD/SMT
Y1: library part CMP-1688-00002-1, "Ceramic SMD Crystal, 8 MHz, +/- 20 ppm, 200 Ohm, -20 to 70 degC, 4-Pin SMD, RoHS, Tape and Reel", Manufacturer=Abracon, Max Operating Temperature="85 degC", Max Supply Voltage="45 V", Min Operating Temperature="-40 degC", Min Supply Voltage="8.2 V", Output Current="1.8 A", Output Voltage="3.3 V", Package Quantity=50, Switching Frequency="30 KHz", ComponentLink1Description="Manufacturer URL", ComponentLink1URL=http://www.abracon.com/, ComponentLink2Description=Datasheet, ComponentLink2URL=http://www.abracon.com/Resonators/abm3b.pdf, DatasheetVersion=Aug-15, Height="1.05 mm", Length="9.8 mm", Mount="Surface Mount", Outputs=4, PackageDescription="4-Pin Surface Mount Device, Body 5 x 3.2 mm", PackageReference=ABM3B, Packaging=Rail/Tube, Part Number=ABM3B-20.000MHZ-B2-T, Pins=28, Radiation Hardening=No, REACH SVHC="No SVHC", RoHSCompliant=true, Weight="0.004233 oz", Width="4.5 mm"
Y2: library part CMP-1669-00002-2, "CRYSTAL 8.00 MHZ 20PF 49US", Manufacturer=ECS, ComponentLink1Description=Datasheet, ComponentLink1URL=http://www.ecsxtal.com/store/pdf/hc-49usx.pdf, PackageReference=4X-3IL, Part Number=ECS-035-18-4X-DU

## Via types
v1: diameter 1.016, hole 0.508, Top Layer to Bottom Layer, tented both sides, 78 vias
v2: diameter 0.61, hole 0.305, Top Layer to Bottom Layer, 9 vias

## Nets (pads, with @x,y where several pads share a name; then routed paths per layer and width w, separated by ;. In a path a pad name is that pad's centre, name@x,y a point inside that pad or via, vN(x,y) a via of type N, cw(c..) or ccw(c..) an arc to the next point about the centre after c; other vN are vias at no path point)
3V3: C1.1 C7.1 C8.1 C9.1 C17.1 C19.2 C20.2 C21.2 C33.1 N5.3 N6.4 R1.2 R2.2 R22.1 R26.2 R27.1 R29.1 R40.2 R41.2 R42.2 R43.2 R44.2 R45.2 TNC_EGY.1 TNC_PROG.2 U1.8 U2.5 U3.16 U4.1 U5.18 U5.24 U6.15 U6.16 U7.7 U8.7 U8.8 U9.24 U9.25 UHFC.3 UHFC.17 VHFC.2 VHFC.3 | length 363.3
  Top Layer w0.203: U9.25@59.047,-63.48 59.047,-62.11 59.743,-61.414 C33.1@59.743,-61.214 ; v1(59.743,-58.473) C33.1@59.743,-61.214 ; U9.24@59.847,-64.28 61.069,-64.28 61.341,-64.008 61.341,-61.722 60.833,-61.214 C33.1@59.743,-61.214
  Top Layer w0.254: v1(-17.653,0.762) -10.287,0.762 -9.779,1.27 TNC_EGY.1@-9.779,2.51 ; v1(-12.827,-24.003) R22.1@-12.827,-26.998 -11.229,-26.998 -10.541,-27.686 U4.1@-9.196,-27.686 -9.166,-27.686 -9.028,-27.548 -9.028,-27.189 -8.421,-26.582 -8.421,-25.566 C7.1@-8.255,-25.4 ; R29.1@-8.89,-79.904 -8.89,-78.105 v1(-8.255,-77.47) ; v1(-2.286,-6.858) -2.921,-7.493 C9.1@-2.921,-8.964 -2.721,-8.964 -2.098,-9.587 -2.098,-9.787 -1.725,-10.16 0.127,-10.16 0.508,-9.779 U2.5@0.508,-8.812 ; v1(0.127,-84.074) 0.183,-84.13 U6.16@3.627,-84.13 5.334,-84.13 ; U8.7@3.027,-77.399 1.326,-77.399 1.143,-77.216 1.143,-76.898 1.292,-76.749 U8.8@3.027,-76.749 3.027,-75.036 2.686,-74.695 1.723,-74.695 C21.2@1.704,-74.676 1.704,-73.099 2.032,-72.771 6.35,-72.771 7.112,-73.533 R27.1@7.112,-75.332 5.482,-75.332 v1(4.699,-74.549) ; U6.15@3.627,-84.78 5.185,-84.78 5.334,-84.631 5.334,-84.13 ; v1(3.683,-27.813) 5.662,-29.792 C20.2@9.652,-29.792 10.996,-29.792 11.811,-30.607 U7.7@13.271,-30.607 ; C19.2@6.477,-86.36 6.477,-84.922 5.685,-84.13 5.334,-84.13 ; v1(22.86,-40.767) 25.252,-38.375 R2.2@29.794,-38.375 ; v1(27.178,-52.578) 27.665,-53.065 R1.2@29.794,-53.065 ; U1.8@31.963,-60.749 31.963,-59.477 32.332,-59.108 C1.1@34.29,-59.108 36.269,-59.108 37.084,-58.293 37.084,-54.229 v1(35.179,-52.324) ; v1(39.878,-70.358) 41.148,-69.088 R43.2@45.233,-69.088 ; v1(42.037,-47.498) 43.561,-45.974 R40.2@45.233,-45.974 ; v1(43.434,-57.785) 44.069,-58.42 R41.2@45.233,-58.42 R42.2@45.233,-61.341 ; U3.16@47.014,-13.335 C8.1@51.001,-13.335 51.093,-13.427 51.093,-14.517 52.705,-16.129 v1(54.356,-16.129) ; v1(54.864,-77.343) 55.626,-76.581 R45.2@55.626,-75.163 ; U5.18@61.247,-38.798 59.499,-38.798 58.928,-38.227 58.928,-35.687 59.627,-34.989 U5.24@61.247,-34.989 ; v1(62.23,-29.972) 62.23,-30.099 61.021,-31.308 60.948,-31.308 60.325,-31.931 C17.1@60.325,-32.131 60.325,-32.331 61.247,-33.253 U5.24@61.247,-34.989 ; R44.2@62.357,-75.163 62.357,-76.708 v1(62.865,-77.216) ; R26.2@64.516,-32.66 64.316,-32.66 61.988,-34.989 U5.24@61.247,-34.989
  Top Layer w0.635: VHFC.3@60.23,-89.535 VHFC.2@62.23,-87.535
  Bottom Layer w0.635: UHFC.17@8.18,-67.772 8.18,-71.256 7.808,-71.628 -5.207,-71.628 -13.081,-63.754 -13.081,-61.595 ; UHFC.3@8.18,-53.772 10.109,-53.772 11.811,-52.07 11.811,-49.276 10.16,-47.625 0.889,-47.625 -13.081,-61.595 ; VHFC.3@60.23,-89.535 60.23,-92.551 58.039,-94.742 -27.432,-94.742 -29.083,-93.091 -29.083,-64.262 -26.416,-61.595 N6.4@-25.07,-61.595 -13.081,-61.595
5VOUT: N6.5
ADC1_9_COM_VHF_RFS: VHFC.15
COM_UHF_AUD_IN: C26.2 UHFC.15 UHFi.1 | length 59.1
  Top Layer w0.203: v1(38.1,-52.197) 39.6,-50.697 44.585,-50.697 44.585,-49.825 45.233,-50.473 C26.2@45.233,-50.673
  Layer 1 w0.203: UHFC.15@8.18,-65.772 13.782,-71.374 18.923,-71.374 20.828,-69.469 29.972,-69.469 38.1,-61.341 v1(38.1,-52.197)
  Bottom Layer w0.203: v1(38.1,-52.197) 40.386,-54.483 UHFi.1@41.656,-54.483
COM_UHF_AUD_OUT: C27.2 UHFC.18 UHFo.1 | length 56.9
  Top Layer w0.203: v1(41.783,-59.309) 41.783,-54.61 41.529,-54.356 42.037,-53.848 44.585,-53.848 44.585,-54.188 45.233,-53.54 C27.2@45.233,-53.34
  Layer 1 w0.203: UHFC.18@6.18,-67.772 6.18,-69.299 8.89,-72.009 19.812,-72.009 21.59,-70.231 30.861,-70.231 v1(41.783,-59.309)
  Bottom Layer w0.203: v1(41.783,-59.309) 41.91,-59.436 UHFo.1@41.91,-62.865
COM_UHF_BP: DBG1.13 N5.8 UHFC.6 | length 99.4
  Top Layer w0.254: v1(15.494,-56.769) 15.494,-60.325 19.177,-64.008 21.793,-64.008 N5.8@23.19,-62.611
  Layer 1 w0.254: DBG1.13@22.86,2.54 21.59,1.27 21.59,-0.889 9.525,-12.954 9.525,-19.05 18.796,-28.321 18.796,-58.217 N5.8@23.19,-62.611
  Bottom Layer w0.254: UHFC.6@6.18,-55.772 7.177,-56.769 v1(15.494,-56.769)
COM_UHF_EN/D\I\S\: DBG1.9 N8.6 UHFC.4 | length 117.3
  Top Layer w0.254: N8.6@-25.07,-89.535 -8.509,-72.974 -8.509,-66.548 4.267,-53.772 UHFC.4@6.18,-53.772
  Layer 2 w0.254: UHFC.4@6.18,-53.772 4.826,-52.418 4.826,-51.181 27.559,-28.448 27.559,-15.367 29.21,-13.716 29.21,1.27 DBG1.9@27.94,2.54
COM_UHF_RFS: UHFC.14
COM_UHF_TOP/B\O\T\: DBG1.15 N5.9 UHFC.8 | length 99.2
  Top Layer w0.254: UHFC.8@6.18,-57.772 7.183,-56.769 10.541,-56.769 18.923,-65.151 N5.9@23.19,-65.151
  Layer 1 w0.254: DBG1.15@20.32,2.54 19.05,1.27 19.05,-2.413 8.89,-12.573 8.89,-19.177 17.907,-28.194 17.907,-58.547 18.796,-59.436 18.796,-59.944 21.082,-62.23 21.082,-63.043 N5.9@23.19,-65.151
COM_UHF_TX/R\X\: DBG1.7 N8.4 UHF_TRANS.1 UHFC.2 | length 123.4
  Top Layer w0.254: N8.4@-25.07,-84.455 -9.906,-69.291 -9.906,-63.754 2.076,-51.772 UHFC.2@6.18,-51.772
  Layer 2 w0.254: UHFC.2@6.18,-51.772 31.75,-26.202 31.75,1.27 DBG1.7@30.48,2.54
  Bottom Layer w0.254: DBG1.7@30.48,2.54 31.75,1.27 31.75,-6.731 UHF_TRANS.1@31.623,-6.858
COM_VHF_AUD_IN: C30.2 VHFC.6 VHFi.1 | length 44
  Top Layer w0.203: v1(42.418,-75.438) 40.767,-75.438 38.735,-73.406 38.735,-68.199 40.513,-66.421 C30.2@45.233,-66.421
  Bottom Layer w0.203: VHFi.1@42.291,-70.358 42.418,-70.485 v1(42.418,-75.438) 42.418,-77.216 49.53,-84.328 55.023,-84.328 VHFC.6@58.23,-87.535
COM_VHF_AUD_OUT: C31.2 VHFC.4 VHFo.1 | length 27.2
  Top Layer w0.203: C31.2@45.233,-74.168 45.332,-74.267 45.332,-75.304 47.371,-77.343 50.927,-77.343 v1(51.562,-77.978)
  Bottom Layer w0.203: VHFo.1@47.302,-76.904 VHFo.1@46.863,-77.343 50.927,-77.343 v1(51.562,-77.978) 60.23,-86.646 VHFC.4@60.23,-87.535
COM_VHF_HP/L\P\: DBG1.23 N9.2 VHFC.16 | length 120.3
  Layer 1 w0.254: DBG1.23@10.16,2.54 8.89,1.27 8.89,-0.635 7.62,-1.905 7.62,-20.193 14.986,-27.559 14.986,-46.736 v1(16.002,-47.752)
  Layer 2 w0.254: v1(16.002,-47.752) 16.002,-49.276 13.716,-51.562 13.716,-69.088 18.923,-74.295 N9.2@23.19,-74.295
  Bottom Layer w0.254: N9.2@23.19,-74.295 36.703,-74.295 48.23,-85.822 VHFC.16@48.23,-87.535